# Altium PCB 2016.PcbDoc (part 4 of 6)
Units mm, origin at the board's own origin, x right, y up, seen from the top; angles counter-clockwise.
Board outline 169.8 x 134.24 mm, 2 copper layers (Top Layer, Bottom Layer); 131 components, 191 nets, 797 pads, 168 vias.
Unrouted connection lines stored in the file: 2.
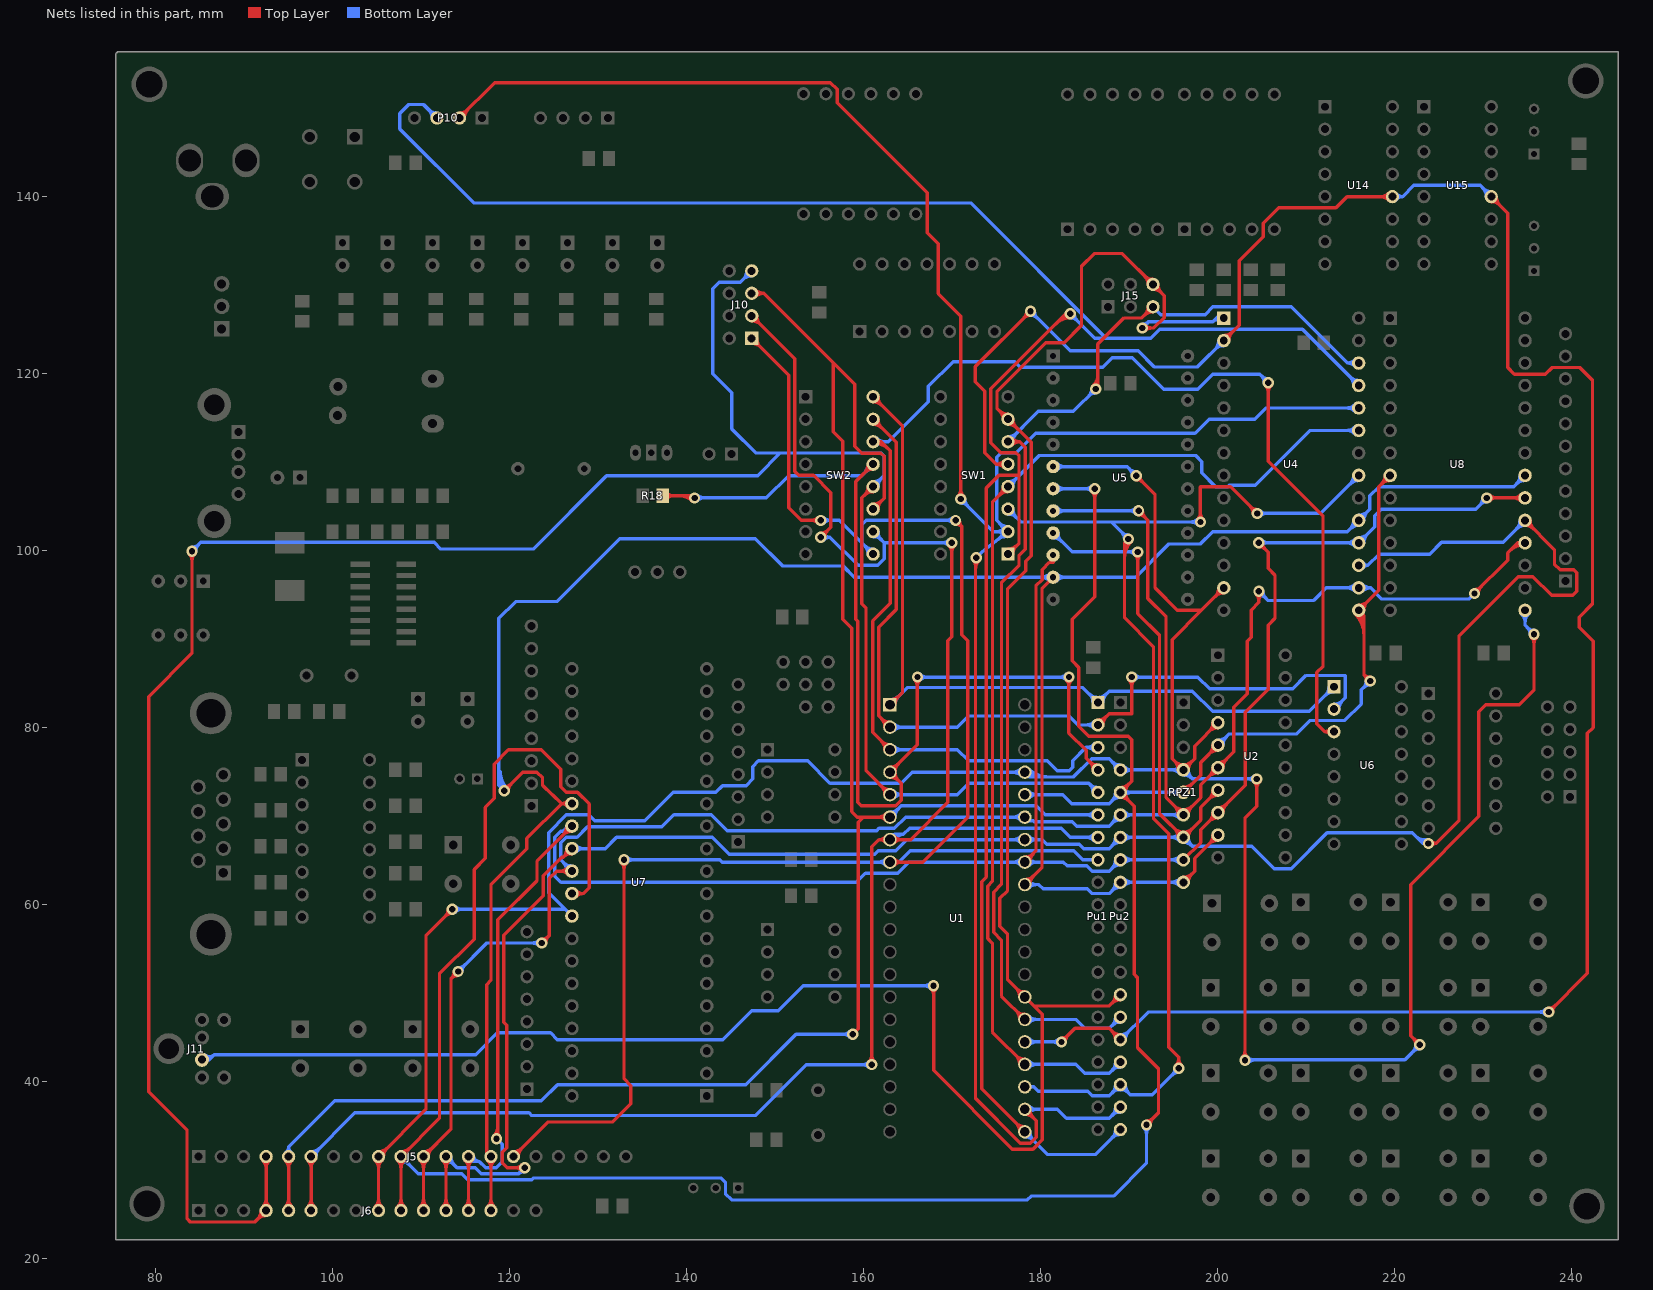
[diagram p4: the nets of this part, all layers, seen from the top]

## Via types
v1: diameter 1.27, hole 0.711, Top Layer to Bottom Layer, 165 vias
v2: diameter 1, hole 0.5, Top Layer to Bottom Layer, 3 vias

## Nets (pads, with @x,y where several pads share a name; then routed paths per layer and width w, separated by ;. In a path a pad name is that pad's centre, name@x,y a point inside that pad or via, vN(x,y) a via of type N, cw(c..) or ccw(c..) an arc to the next point about the centre after c; other vN are vias at no path point) (continued)
P0.2: J5.9 J6.9 Pu2.4 RPZ1.4 U1.37 U2.4 U4.13 U5.6 U7.32 U8.15 | length 375.8
  Top Layer w0.381: J6.9@104.76,25.796 ccw(c103.805,26.751) 105.156,26.751 ccw(c106.507,26.751) J6.9@105.552,25.796 ; J5.9@104.76,31.1 cw(c103.805,30.145) 105.156,30.145 cw(c106.507,30.145) J5.9@105.552,31.1 ; J6.9@105.156,25.4 J5.9@105.156,31.496 110.515,36.855 110.515,56.464 v1(113.487,59.436) ; J5.9@105.156,32.055 ccw(c105.156,33.406) 106.111,32.451 ccw(c107.066,31.496) J5.9@105.715,31.496 ; v1@113.043,59.436 cw(c111.97,59.436) 112.728,58.677 cw(c113.487,57.918) v1@113.487,58.991 ; v1@190.754,107.988 cw(c190.754,106.915) 191.513,107.674 cw(c192.272,108.433) v1@191.198,108.433 ; v1(190.754,108.433) 192.888,106.299 192.888,95.737 195.416,93.209 198.111,93.209 ; RPZ1.4@195.516,75.184 ccw(c194.137,75.184) 195.112,76.16 ccw(c196.088,77.135) 196.088,75.755 ccw(c196.088,77.135) 197.064,76.16 ccw(c198.039,75.184) RPZ1.4@196.659,75.184 ; U2.4@199.428,80.518 cw(c198.048,80.518) 199.024,79.542 cw(c200,78.567) U2.4@200,79.947 ; U2.4@200,80.518 197.358,77.876 197.358,76.454 RPZ1.4@196.088,75.184 194.818,76.454 194.818,89.916 198.111,93.209 ; U4.13@200.088,95.758 cw(c198.709,95.758) 199.684,94.782 cw(c200.66,93.807) U4.13@200.66,95.186 ; U4.13@200.66,95.758 198.111,93.209 ; v1@202.733,42.682 ccw(c201.974,43.44) 203.048,43.44 ccw(c204.121,43.44) v1@203.362,42.682 ; v1(203.048,42.367) 203.048,69.748 204.394,71.095 v1(204.394,74.168) ; v1@204.079,73.854 cw(c203.321,73.095) 204.394,73.095 cw(c205.467,73.095) v1@204.708,73.854 ; v1@222.364,44.12 ccw(c221.291,44.12) 222.05,44.879 ccw(c222.809,45.637) v1@222.809,44.564 ; v1(222.809,44.12) 221.767,45.161 221.767,62.23 229.463,69.925 229.463,81.762 230.251,82.55 234.035,82.55 235.712,84.227 v1(235.712,90.5) ; v1@235.398,90.186 cw(c234.639,89.427) 235.712,89.427 cw(c236.785,89.427) v1@236.026,90.186
  Bottom Layer w0.381: v1(113.487,59.436) 126.238,59.436 ; v1@113.802,59.122 cw(c114.56,58.363) 114.56,59.436 cw(c114.56,60.509) v1@113.802,59.75 ; U7.32@127,58.674 126.238,59.436 ; U1.37@177.777,74.526 ccw(c176.801,73.55) 176.801,74.93 ccw(c176.801,76.31) U1.37@177.777,75.334 ; U1.37@178.046,74.795 ccw(c179.039,75.788) 179.039,74.384 ; U1.37@178.316,75.065 ccw(c179.959,76.708) 179.959,74.384 ; U1.37@178.585,75.334 ccw(c180.879,77.628) 180.879,74.384 ; U5.6@181.376,109.454 189.733,109.454 v1(190.754,108.433) ; U5.6@181.772,109.058 cw(c182.727,108.103) 182.727,109.454 cw(c182.727,110.805) U5.6@181.772,109.85 ; Pu2.4@188.417,75.184 ccw(c187.066,75.184) 188.021,76.139 ccw(c188.976,77.094) Pu2.4@188.976,75.743 ; Pu2.4@189.372,74.788 cw(c190.327,73.833) 190.327,75.184 cw(c190.327,76.535) Pu2.4@189.372,75.58 ; v1@190.309,108.433 ccw(c189.236,108.433) 189.995,109.191 ccw(c190.754,109.95) v1@190.754,108.877 ; RPZ1.4@195.684,74.78 ccw(c194.708,73.804) 194.708,75.184 ccw(c194.708,76.564) RPZ1.4@195.684,75.588 ; RPZ1.4@196.088,74.612 cw(c196.088,73.233) 197.064,74.208 cw(c198.039,75.184) RPZ1.4@196.659,75.184 ; v1(203.048,42.367) 203.124,42.443 221.132,42.443 v1(222.809,44.12) ; v1@203.362,42.053 cw(c204.305,41.11) 204.305,42.443 ; v1@203.362,42.682 ccw(c203.937,43.256) 203.937,42.443 ; v1@204.079,73.854 ccw(c203.321,73.095) 203.321,74.168 ccw(c203.321,75.241) v1@204.079,74.482 ; v1(204.394,74.168) 197.104,74.168 RPZ1.4@196.088,75.184 Pu2.4@188.976,75.184 187.706,76.454 185.737,76.454 183.667,74.384 178.727,74.384 U1.37@178.181,74.93 165.456,74.93 164.198,73.673 156.159,73.673 153.632,76.2 148.082,76.2 147.447,75.565 147.447,74.168 146.685,73.406 144.018,73.406 143.256,72.644 138.43,72.644 135.217,69.431 129.578,69.431 128.905,70.104 126.365,70.104 124.371,68.11 124.371,61.303 126.238,59.436 ; v1@222.364,44.12 cw(c221.291,44.12) 222.05,43.361 cw(c222.809,42.602) v1@222.809,43.675 ; U8.15@234.292,92.814 cw(c233.316,91.838) 234.696,91.838 cw(c236.076,91.838) U8.15@235.1,92.814 ; U8.15@234.696,93.218 234.696,91.516 v1(235.712,90.5) ; v1@235.267,90.5 ccw(c234.194,90.5) 234.953,91.259 ccw(c235.712,92.018) v1@235.712,90.945
P0.3: J5.10 J6.10 Pu2.5 RPZ1.5 U1.36 U2.5 U4.15 U5.7 U7.31 U8.8 | length 384.9
  Top Layer w0.381: J6.10@107.3,25.796 ccw(c106.345,26.751) 107.696,26.751 ccw(c109.047,26.751) J6.10@108.092,25.796 ; J5.10@107.3,31.1 cw(c106.345,30.145) 107.696,30.145 cw(c109.047,30.145) J5.10@108.092,31.1 ; J6.10@107.696,25.4 J5.10@107.696,31.496 112.039,35.839 112.039,52.146 115.951,56.058 115.951,63.932 117.196,65.176 117.196,70.942 118.212,71.958 118.212,75.844 119.837,77.47 123.52,77.47 125.73,75.26 125.73,73.279 126.365,72.644 127.635,72.644 128.943,71.336 128.943,61.887 128.27,61.214 ; J5.10@107.696,32.055 ccw(c107.696,33.406) 108.651,32.451 ccw(c109.606,31.496) J5.10@108.255,31.496 ; U7.31@127,61.214 128.27,61.214 ; U7.31@127.428,60.835 cw(c128.27,60.089) 128.27,61.214 ; U7.31@127.428,61.593 ccw(c128.27,62.339) 128.27,61.214 ; v1@185.766,106.64 cw(c185.007,105.881) 186.08,105.881 cw(c187.154,105.881) v1@186.395,106.64 ; v1(186.08,106.954) 186.08,94.767 183.54,92.227 183.54,87.503 184.29,86.754 184.29,80.124 185.42,78.994 189.865,78.994 190.246,78.613 190.246,73.914 Pu2.5@188.976,72.644 190.551,71.069 190.551,52.071 190.907,51.715 190.907,43.814 193.281,41.44 193.281,36.436 v1(191.922,35.077) ; Pu2.5@188.976,72.085 cw(c188.976,70.734) 189.931,71.689 cw(c190.886,72.644) 189.535,72.644 cw(c190.886,72.644) 189.931,73.599 cw(c188.976,74.554) Pu2.5@188.976,73.203 ; v1@191.922,35.522 ccw(c191.922,36.595) 192.681,35.836 ccw(c193.44,35.077) v1@192.367,35.077 ; RPZ1.5@196.088,72.644 198.044,74.6 198.044,76.022 U2.5@200,77.978 ; RPZ1.5@196.088,73.215 ccw(c196.088,74.595) 197.064,73.62 ccw(c198.039,72.644) RPZ1.5@196.659,72.644 ; U2.5@199.428,77.978 cw(c198.048,77.978) 199.024,77.002 cw(c200,76.027) U2.5@200,77.406 ; U4.15@215.496,92.814 cw(c213.083,90.401) 216.495,90.401 ; U4.15@215.765,93.083 cw(c214.003,91.321) 216.495,91.321 ; U4.15@215.9,93.789 ccw(c215.9,95.169) 216.876,94.194 ccw(c217.851,93.218) U4.15@216.471,93.218 ; U4.15@216.035,93.353 cw(c214.923,92.241) 216.495,92.241 ; v1@216.764,85.251 ccw(c215.845,85.293) 216.495,85.944 ; v1@217.188,85.675 cw(c217.146,86.595) 216.495,85.944 ; v1(217.208,85.231) 216.495,85.944 ; U8.8@218.885,108.458 cw(c217.505,108.458) 218.48,107.482 cw(c219.456,106.507) U8.8@219.456,107.886 ; U8.8@219.456,108.458 218.186,107.188 218.186,95.504 U4.15@215.9,93.218 216.495,92.623 216.495,85.944
  Bottom Layer w0.381: J5.10@107.696,30.937 cw(c107.696,29.586) 108.651,30.541 cw(c109.606,31.496) J5.10@108.255,31.496 ; J5.10@107.696,31.496 109.627,29.565 114.553,29.565 115.239,28.879 122.465,28.879 122.668,29.082 143.845,29.082 144.351,28.575 144.351,27.305 145.062,26.594 178.473,26.594 178.918,27.038 188.201,27.038 191.922,30.759 v1(191.922,35.077) ; U1.36@178.181,72.39 182.448,72.39 183.464,71.374 187.706,71.374 Pu2.5@188.976,72.644 RPZ1.5@196.088,72.644 ; U1.36@178.585,71.986 cw(c179.561,71.01) 179.561,72.39 cw(c179.561,73.77) U1.36@178.585,72.794 ; U5.7@181.376,106.954 v1(186.08,106.954) ; U5.7@181.772,106.558 cw(c182.727,105.603) 182.727,106.954 cw(c182.727,108.305) U5.7@181.772,107.35 ; v1@185.766,106.64 ccw(c185.007,105.881) 185.007,106.954 ccw(c185.007,108.027) v1@185.766,107.268 ; Pu2.5@188.417,72.644 cw(c187.066,72.644) 188.021,71.689 cw(c188.976,70.734) Pu2.5@188.976,72.085 ; Pu2.5@189.372,72.248 cw(c190.327,71.293) 190.327,72.644 cw(c190.327,73.995) Pu2.5@189.372,73.04 ; v1@191.608,34.763 cw(c190.849,34.004) 191.922,34.004 cw(c192.996,34.004) v1@192.237,34.763 ; RPZ1.5@195.684,72.24 ccw(c194.708,71.264) 194.708,72.644 ccw(c194.708,74.024) RPZ1.5@195.684,73.048 ; U2.5@200,77.978 201.27,79.248 208.89,79.248 210.414,80.772 214.351,80.772 216.205,82.626 216.205,84.228 v1(217.208,85.231) ; U2.5@200,78.549 ccw(c200,79.929) 200.975,78.954 ccw(c201.951,77.978) U2.5@200.571,77.978 ; v1@216.764,85.231 cw(c215.69,85.231) 216.449,84.472 cw(c217.208,83.714) v1@217.208,84.787
P0.4: J5.11 J6.11 Pu2.6 RPZ1.6 U1.35 U2.6 U4.16 U5.8 U7.30 U8.18 | length 290.1
  Top Layer w0.381: J6.11@109.84,25.796 ccw(c108.885,26.751) 110.236,26.751 ccw(c111.587,26.751) J6.11@110.632,25.796 ; J5.11@109.84,31.1 cw(c108.885,30.145) 110.236,30.145 cw(c111.587,30.145) J5.11@110.632,31.1 ; J6.11@110.236,25.4 J5.11@110.236,31.496 113.337,34.597 113.337,51.59 v1(114.148,52.4) ; J5.11@110.236,32.055 ccw(c110.236,33.406) 111.191,32.451 ccw(c112.146,31.496) J5.11@110.795,31.496 ; v1@113.703,52.4 cw(c112.63,52.4) 113.389,51.641 cw(c114.148,50.883) v1@114.148,51.956 ; v1(123.596,55.626) 124.435,56.464 124.435,62.918 125.271,63.754 U7.30@127,63.754 ; v1@123.596,56.07 ccw(c123.596,57.144) 124.355,56.385 ccw(c125.114,55.626) v1@124.041,55.626 ; U7.30@126.596,63.35 ccw(c125.62,62.374) 125.62,63.754 ccw(c125.62,65.134) U7.30@126.596,64.158 ; v1@191.035,104.01 cw(c191.035,102.936) 191.793,103.695 cw(c192.552,104.454) v1@191.479,104.454 ; v1(191.035,104.454) 192.075,103.414 192.075,94.551 194.132,92.494 194.132,72.06 RPZ1.6@196.088,70.104 198.044,72.06 198.044,73.482 U2.6@200,75.438 201.803,77.241 201.803,82.271 203.327,83.795 203.327,89.738 203.759,90.17 203.759,93.243 204.622,94.107 v1(204.622,95.377) ; RPZ1.6@195.516,70.104 ccw(c194.137,70.104) 195.112,71.08 ccw(c196.088,72.055) 196.088,70.675 ccw(c196.088,72.055) 197.064,71.08 ccw(c198.039,70.104) RPZ1.6@196.659,70.104 ; U2.6@199.428,75.438 cw(c198.048,75.438) 199.024,74.462 cw(c200,73.487) U2.6@200,74.867 ; U2.6@200,76.01 ccw(c200,77.389) 200.975,76.414 ccw(c201.951,75.438) U2.6@200.571,75.438 ; v1@204.308,95.063 cw(c203.549,94.304) 204.622,94.304 cw(c205.696,94.304) v1@204.937,95.063 ; v1(228.981,95.123) 232.74,98.882 232.74,99.695 233.883,100.838 U8.18@234.696,100.838 ; v1@228.981,95.567 ccw(c228.981,96.641) 229.74,95.882 ccw(c230.499,95.123) v1@229.425,95.123 ; 232.984,99.939 cw(c234.695,98.228) U8.18@234.696,100.647 ; 233.634,100.589 cw(c234.696,99.528) U8.18@234.696,101.028
  Bottom Layer w0.381: v1(114.148,52.4) 117.373,55.626 v1(123.596,55.626) ; v1@114.148,52.845 ccw(c114.148,53.918) 114.906,53.159 ccw(c115.665,52.4) v1@114.592,52.4 ; v1@123.282,55.312 ccw(c122.523,54.553) 122.523,55.626 ccw(c122.523,56.699) v1@123.282,55.94 ; U7.30@126.428,63.754 ccw(c125.049,63.754) 126.024,64.73 ccw(c127,65.705) U7.30@127,64.325 ; U7.30@127,63.754 125.743,65.011 125.743,66.942 126.365,67.564 127.584,67.564 128.765,68.745 137.173,68.745 138.532,70.104 142.773,70.104 144.551,68.326 161.442,68.326 161.696,68.58 163.449,68.58 164.719,69.85 U1.35@178.181,69.85 178.181,69.444 179.121,69.444 179.222,69.342 183.54,69.342 184.048,68.834 187.706,68.834 Pu2.6@188.976,70.104 RPZ1.6@196.088,70.104 ; U1.35@177.777,69.446 ccw(c176.801,68.47) 176.801,69.85 ccw(c176.801,71.23) U1.35@177.777,70.254 ; U5.8@181.376,104.454 v1(191.035,104.454) ; U5.8@181.772,104.058 cw(c182.727,103.103) 182.727,104.454 cw(c182.727,105.805) U5.8@181.772,104.85 ; Pu2.6@188.417,70.104 cw(c187.066,70.104) 188.021,69.149 cw(c188.976,68.194) Pu2.6@188.976,69.545 ; Pu2.6@189.372,69.708 cw(c190.327,68.753) 190.327,70.104 cw(c190.327,71.455) Pu2.6@189.372,70.5 ; v1@190.72,104.14 ccw(c189.962,103.381) 189.962,104.454 ccw(c189.962,105.527) v1@190.72,104.768 ; RPZ1.6@195.684,69.7 ccw(c194.708,68.724) 194.708,70.104 ccw(c194.708,71.484) RPZ1.6@195.684,70.508 ; v1@204.622,94.932 cw(c204.622,93.859) 205.381,94.618 cw(c206.14,95.377) v1@205.067,95.377 ; v1(204.622,95.377) 205.677,94.323 210.795,94.323 212.23,95.758 U4.16@215.9,95.758 217.246,95.758 ; U4.16@215.496,95.354 ccw(c214.52,94.378) 214.52,95.758 ccw(c214.52,97.138) U4.16@215.496,96.162 ; U4.16@216.311,95.361 cw(c217.246,94.458) 217.246,95.758 ; U4.16@216.311,96.155 ccw(c217.246,97.058) 217.246,95.758 ; v1(228.981,95.123) 228.346,94.488 218.516,94.488 217.246,95.758
P0.5: J5.12 J6.12 Pu2.7 RPZ1.7 U1.34 U2.7 U4.17 U5.9 U7.29 U8.19 | length 336
  Top Layer w0.381: J6.12@112.38,25.796 ccw(c111.425,26.751) 112.776,26.751 ccw(c114.127,26.751) J6.12@113.172,25.796 ; J5.12@112.38,31.1 cw(c111.425,30.145) 112.776,30.145 cw(c114.127,30.145) J5.12@113.172,31.1 ; J6.12@112.776,25.4 J5.12@112.776,31.496 ; v1@121.352,29.912 ccw(c120.593,29.153) 120.593,30.226 ccw(c120.593,31.299) v1@121.352,30.54 ; v1(121.666,30.226) 119.697,30.226 119.126,30.797 119.126,31.987 119.621,32.482 119.621,46.341 119.303,46.659 119.303,56.514 123.749,60.96 123.749,63.246 125.832,65.329 126.035,65.329 ; U7.29@126.429,66.29 cw(c125.084,66.279) 126.035,65.329 ; U7.29@126.996,65.723 ccw(c126.985,64.378) 126.035,65.329 ; U7.29@127,66.294 126.035,65.329 ; v1@190.63,99.5 cw(c189.871,98.741) 190.945,98.741 cw(c192.018,98.741) v1@191.259,99.5 ; v1(190.945,99.814) 190.945,92.85 193.396,90.399 193.396,70.256 RPZ1.7@196.088,67.564 198.044,69.52 198.044,70.942 U2.7@200,72.898 ; RPZ1.7@195.516,67.564 ccw(c194.137,67.564) 195.112,68.54 ccw(c196.088,69.515) 196.088,68.135 ccw(c196.088,69.515) 197.064,68.54 ccw(c198.039,67.564) RPZ1.7@196.659,67.564 ; U2.7@199.428,72.898 cw(c198.048,72.898) 199.024,71.922 cw(c200,70.947) U2.7@200,72.326 ; v1(223.774,66.878) 224.663,66.878 ; v1@224.13,66.612 cw(c224.663,66.212) 224.663,66.878 ; v1@224.13,67.145 ccw(c224.663,67.545) 224.663,66.878 ; U8.19@234.696,102.806 cw(c234.696,101.427) 235.672,102.402 cw(c236.647,103.378) U8.19@235.267,103.378 ; U8.19@234.696,103.378 238.023,100.051 238.023,98.425 238.658,97.79 240.22,97.79 240.538,97.472 240.538,95.377 240.068,94.907 237.693,94.907 235.585,97.015 233.947,97.015 227.228,90.297 227.228,69.444 224.663,66.878
  Bottom Layer w0.381: J5.12@112.776,30.937 cw(c112.776,29.586) 113.731,30.541 cw(c114.686,31.496) J5.12@113.335,31.496 ; J5.12@112.776,31.496 114.021,30.251 116.078,30.251 116.764,29.565 121.005,29.565 ; v1@121.224,30.181 cw(c120.467,30.103) 121.005,29.565 ; v1@121.621,29.784 ccw(c121.543,29.027) 121.005,29.565 ; v1(121.666,30.226) 121.005,29.565 ; U7.29@127,66.294 130.772,66.294 132.042,67.564 142.875,67.564 144.78,65.659 161.226,65.659 161.62,66.053 163.589,66.053 164.846,67.31 U1.34@178.181,67.31 180.137,67.31 180.645,66.802 184.328,66.802 184.836,66.294 187.706,66.294 Pu2.7@188.976,67.564 RPZ1.7@196.088,67.564 197.104,66.548 203.822,66.548 206.35,64.021 208.267,64.021 212.319,68.072 221.945,68.072 223.139,66.878 v1(223.774,66.878) ; U7.29@127.404,65.89 cw(c128.38,64.914) 128.38,66.294 cw(c128.38,67.674) U7.29@127.404,66.698 ; U1.34@177.777,66.906 ccw(c176.801,65.93) 176.801,67.31 ccw(c176.801,68.69) U1.34@177.777,67.714 ; U1.34@178.585,66.906 cw(c179.561,65.93) 179.561,67.31 cw(c179.561,68.69) U1.34@178.585,67.714 ; U5.9@181.376,101.395 cw(c181.376,100.044) 182.331,100.999 cw(c183.286,101.954) U5.9@181.936,101.954 ; U5.9@181.376,101.954 183.516,99.814 v1(190.945,99.814) ; Pu2.7@188.417,67.564 cw(c187.066,67.564) 188.021,66.609 cw(c188.976,65.654) Pu2.7@188.976,67.005 ; Pu2.7@189.372,67.168 cw(c190.327,66.213) 190.327,67.564 cw(c190.327,68.915) Pu2.7@189.372,67.96 ; v1@190.63,99.5 ccw(c189.871,98.741) 189.871,99.814 ccw(c189.871,100.887) v1@190.63,100.129 ; RPZ1.7@195.684,67.16 ccw(c194.708,66.184) 194.708,67.564 ccw(c194.708,68.944) RPZ1.7@195.684,67.968 ; RPZ1.7@196.088,66.992 cw(c196.088,65.613) 197.064,66.588 cw(c198.039,67.564) RPZ1.7@196.659,67.564 ; U4.17@215.9,98.298 216.941,98.298 ; U4.17@216.382,97.991 cw(c216.941,97.635) 216.941,98.298 ; U4.17@216.382,98.605 ccw(c216.941,98.961) 216.941,98.298 ; 222.263,67.754 ccw(c223.392,68.884) v1@223.691,67.315 ; 222.772,67.245 ccw(c223.555,68.029) v1@223.762,66.941 ; U8.19@234.124,103.378 cw(c232.745,103.378) 233.72,102.402 cw(c234.696,101.427) U8.19@234.696,102.806 ; U8.19@234.696,103.378 232.215,100.897 225.255,100.897 223.926,99.568 218.211,99.568 216.941,98.298
P0.6: J5.13 J6.13 Pu2.8 RPZ1.8 U1.33 U2.8 U4.18 U5.10 U7.28 U8.20 | length 285.1
  Top Layer w0.381: J6.13@114.92,25.796 ccw(c113.965,26.751) 115.316,26.751 ccw(c116.667,26.751) J6.13@115.712,25.796 ; J5.13@114.92,31.1 cw(c113.965,30.145) 115.316,30.145 cw(c116.667,30.145) J5.13@115.712,31.1 ; J6.13@115.316,25.4 J5.13@115.316,31.496 ; v1@118.177,33.817 ccw(c117.113,34.881) 118.617,34.881 ; v1(118.491,33.503) 118.617,33.629 118.617,58.241 123.063,62.687 123.063,64.897 U7.28@127,68.834 ; 118.617,34.271 ccw(c119.259,34.271) v1@118.805,33.817 ; U7.28@126.428,68.834 cw(c125.049,68.834) 126.024,67.858 cw(c127,66.883) U7.28@127,68.263 ; U1.33@178.181,64.77 179.438,66.027 179.438,95.986 180.131,96.679 180.131,97.79 180.964,98.623 181.376,98.623 U5.10@181.376,99.454 ; U1.33@178.181,65.341 ccw(c178.181,66.721) 179.157,65.746 ccw(c180.132,64.77) U1.33@178.752,64.77 ; RPZ1.8@196.088,65.024 198.044,66.98 198.044,68.402 U2.8@200,70.358 203.073,73.431 203.073,81.712 205.664,84.303 205.664,91.516 206.439,92.291 206.439,97.206 205.664,97.98 205.664,99.797 v1(204.597,100.863) ; U2.8@199.428,70.358 cw(c198.048,70.358) 199.024,69.382 cw(c200,68.407) U2.8@200,69.787 ; U2.8@200,70.929 ccw(c200,72.309) 200.975,71.334 ccw(c201.951,70.358) U2.8@200.571,70.358 ; v1@204.597,100.419 cw(c204.597,99.346) 205.356,100.105 cw(c206.115,100.863) v1@205.041,100.863 ; v1(230.378,105.918) U8.20@234.696,105.918 ; v1@230.692,105.604 cw(c231.451,104.845) 231.451,105.918 cw(c231.451,106.991) v1@230.692,106.232 ; U8.20@234.292,105.514 ccw(c233.316,104.538) 233.316,105.918 ccw(c233.316,107.298) U8.20@234.292,106.322
  Bottom Layer w0.381: J5.13@115.316,31.496 115.876,30.936 116.561,30.936 ; J5.13@115.493,31.515 ccw(c116.137,31.584) 116.137,30.936 ; J5.13@115.872,31.556 ccw(c116.561,31.629) 116.561,30.936 ; v1(118.491,33.503) 119.126,32.868 119.126,30.912 118.465,30.251 117.247,30.251 116.561,30.936 ; 126.149,68.25 ccw(c126.149,68.914) U7.28@126.81,68.852 ; U7.28@126.431,68.888 cw(c125.73,68.954) 125.73,68.25 ; U7.28@127,68.834 126.416,68.25 125.73,68.25 ; U1.33@177.777,64.366 ccw(c176.801,63.39) 176.801,64.77 ccw(c176.801,66.15) U1.33@177.777,65.174 ; U1.33@178.585,64.366 cw(c179.561,63.39) 179.561,64.77 cw(c179.561,66.15) U1.33@178.585,65.174 ; Pu2.8@188.417,65.024 cw(c187.066,65.024) 188.021,64.069 cw(c188.976,63.114) Pu2.8@188.976,64.465 ; Pu2.8@189.372,64.628 cw(c190.327,63.673) 190.327,65.024 cw(c190.327,66.375) Pu2.8@189.372,65.42 ; RPZ1.8@195.684,64.62 ccw(c194.708,63.644) 194.708,65.024 ccw(c194.708,66.404) RPZ1.8@195.684,65.428 ; RPZ1.8@196.088,65.024 Pu2.8@188.976,65.024 187.706,63.754 185.776,63.754 185.191,64.338 182.956,64.338 182.524,64.77 U1.33@178.181,64.77 165.075,64.77 163.805,63.5 160.172,63.5 159.156,62.484 125.768,62.484 125.057,63.195 125.057,67.577 125.73,68.25 ; v1(204.597,100.863) 204.622,100.838 U4.18@215.9,100.838 217.703,102.641 217.703,103.911 218.44,104.648 229.108,104.648 v1(230.378,105.918) ; v1@204.911,100.549 cw(c205.609,99.852) 205.609,100.838 ; v1@204.911,101.178 ccw(c205.731,101.998) 205.731,100.838 ; U4.18@215.496,100.434 ccw(c214.52,99.458) 214.52,100.838 ccw(c214.52,102.218) U4.18@215.496,101.242 ; U4.18@215.9,101.409 ccw(c215.9,102.789) 216.876,101.814 ccw(c217.851,100.838) U4.18@216.471,100.838 ; v1@229.933,105.918 cw(c228.86,105.918) 229.619,105.159 cw(c230.378,104.4) v1@230.378,105.474
P0.7: J5.14 J6.14 Pu2.9 RPZ1.9 U1.32 U2.9 U4.19 U5.11 U7.27 U8.21 | length 305.6
  Top Layer w0.381: J6.14@117.46,25.796 ccw(c116.505,26.751) 117.856,26.751 ccw(c119.207,26.751) J6.14@118.252,25.796 ; J5.14@117.46,31.1 cw(c116.505,30.145) 117.856,30.145 cw(c119.207,30.145) J5.14@118.252,31.1 ; J6.14@117.856,25.4 J5.14@117.856,31.496 117.361,31.991 117.361,50.914 117.856,51.409 117.856,62.23 121.911,66.285 121.911,67.437 125.848,71.374 ; v1(119.355,72.822) 121.463,74.93 123.05,74.93 123.685,74.295 123.685,73.419 125.848,71.374 ; v1@119.355,73.266 ccw(c119.355,74.339) 120.113,73.581 ccw(c120.872,72.822) v1@119.799,72.822 ; U7.27@126.545,71.028 ccw(c125.848,70.499) 125.848,71.374 ; U7.27@126.545,71.72 cw(c125.848,72.249) 125.848,71.374 ; U7.27@127,71.374 125.848,71.374 ; U1.32@178.181,62.23 180.124,64.173 180.124,95.702 U5.11@181.376,96.954 ; U1.32@178.181,62.801 ccw(c178.181,64.181) 179.157,63.206 ccw(c180.132,62.23) U1.32@178.752,62.23 ; RPZ1.9@196.088,62.484 197.358,63.754 197.358,65.176 U2.9@200,67.818 ; RPZ1.9@196.088,63.055 ccw(c196.088,64.435) 197.064,63.46 ccw(c198.039,62.484) RPZ1.9@196.659,62.484 ; U2.9@199.428,67.818 cw(c198.048,67.818) 199.024,66.842 cw(c200,65.867) U2.9@200,67.246
  Bottom Layer w0.381: 118.91,74.048 ccw(c120.581,74.048) v1@119.4,72.867 ; 118.91,74.968 ccw(c121.501,74.968) v1@119.669,73.136 ; v1(119.355,72.822) 118.745,73.431 118.745,92.304 120.65,94.209 125.298,94.209 132.41,101.321 147.726,101.321 150.825,98.222 157.632,98.222 158.9,96.954 190.705,96.954 194.46,100.709 198.016,100.709 199.415,102.108 214.63,102.108 217.17,104.648 217.17,106.147 218.211,107.188 233.426,107.188 U8.21@234.696,108.458 ; U1.32@178.181,62.23 179.756,62.23 180.238,61.747 185.242,61.747 185.776,61.214 187.706,61.214 Pu2.9@188.976,62.484 RPZ1.9@196.088,62.484 ; U1.32@178.585,61.826 cw(c179.561,60.85) 179.561,62.23 cw(c179.561,63.61) U1.32@178.585,62.634 ; U5.11@180.98,96.558 ccw(c180.025,95.603) 180.025,96.954 ccw(c180.025,98.305) U5.11@180.98,97.35 ; U5.11@181.772,96.558 cw(c182.727,95.603) 182.727,96.954 cw(c182.727,98.305) U5.11@181.772,97.35 ; Pu2.9@188.417,62.484 cw(c187.066,62.484) 188.021,61.529 cw(c188.976,60.574) Pu2.9@188.976,61.925 ; Pu2.9@189.372,62.088 cw(c190.327,61.133) 190.327,62.484 cw(c190.327,63.835) Pu2.9@189.372,62.88 ; RPZ1.9@195.684,62.08 ccw(c194.708,61.104) 194.708,62.484 ccw(c194.708,63.864) RPZ1.9@195.684,62.888 ; U4.19@215.328,103.378 cw(c213.949,103.378) 214.924,102.402 cw(c215.9,101.427) U4.19@215.9,102.806 ; U4.19@215.9,103.95 ccw(c215.9,105.329) 216.876,104.354 ccw(c217.851,103.378) U4.19@216.471,103.378 ; U8.21@234.124,108.458 cw(c232.745,108.458) 233.72,107.482 cw(c234.696,106.507) U8.21@234.696,107.886
P1.0: Pu1.1 SW2.16 U1.1 U6.1 | length 103.9
  Top Layer w0.381: SW2.16@161.036,116.789 cw(c161.036,115.438) 161.991,116.393 cw(c162.946,117.348) SW2.16@161.595,117.348 ; SW2.16@161.036,117.348 164.359,114.025 164.359,83.968 U1.1@162.941,82.55 ; U1.1@162.941,83.121 ccw(c162.941,84.501) 163.917,83.526 ccw(c164.892,82.55) U1.1@163.512,82.55
  Bottom Layer w0.381: U1.1@162.941,82.55 164.884,84.493 184.747,84.493 Pu1.1@186.436,82.804 187.706,84.074 197.117,84.074 199.39,81.801 210.325,81.801 U6.1@213.106,84.582 ; U1.1@162.941,83.121 ccw(c162.941,84.501) 163.917,83.526 ccw(c164.892,82.55) U1.1@163.512,82.55 ; Pu1.1@185.877,82.804 ccw(c184.526,82.804) 185.481,83.759 ccw(c186.436,84.714) 186.436,83.363 ccw(c186.436,84.714) 187.391,83.759 ccw(c188.346,82.804) Pu1.1@186.995,82.804 ; U6.1@212.547,84.582 cw(c211.196,84.582) 212.151,83.627 cw(c213.106,82.672) U6.1@213.106,84.023
P1.1: Pu1.2 SW2.15 U1.2 U6.2 | length 116
  Top Layer w0.381: SW2.15@161.036,114.249 cw(c161.036,112.898) 161.991,113.853 cw(c162.946,114.808) SW2.15@161.595,114.808 ; SW2.15@161.036,114.808 163.653,112.191 163.653,93.308 161.671,91.326 161.671,81.28 U1.2@162.941,80.01 ; U1.2@162.369,80.01 ccw(c160.99,80.01) 161.965,80.986 ccw(c162.941,81.961) U1.2@162.941,80.581 ; Pu1.2@186.436,80.264 187.706,81.534 190.246,81.534 v1(190.246,85.674) ; Pu1.2@186.436,80.823 ccw(c186.436,82.174) 187.391,81.219 ccw(c188.346,80.264) Pu1.2@186.995,80.264 ; v1@189.932,85.36 cw(c189.173,84.601) 190.246,84.601 cw(c191.319,84.601) v1@190.56,85.36
  Bottom Layer w0.381: U1.2@162.941,80.01 170.561,80.01 171.831,81.28 183.159,81.28 184.175,80.264 Pu1.2@186.436,80.264 ; U1.2@163.345,79.606 cw(c164.321,78.63) 164.321,80.01 cw(c164.321,81.39) U1.2@163.345,80.414 ; Pu1.2@186.04,79.868 ccw(c185.085,78.913) 185.085,80.264 ccw(c185.085,81.615) Pu1.2@186.04,80.66 ; v1(190.246,85.674) 197.739,85.674 199.072,84.341 208.432,84.341 209.944,85.852 214.376,85.852 214.376,83.312 U6.2@213.106,82.042 ; v1@190.56,85.36 cw(c191.319,84.601) 191.319,85.674 cw(c191.319,86.747) v1@190.56,85.989 ; U6.2@213.106,82.601 ccw(c213.106,83.952) 214.061,82.997 ccw(c215.016,82.042) U6.2@213.665,82.042
P1.2: Pu1.3 SW2.14 U1.3 U6.3 | length 176.6
  Top Layer w0.381: SW2.14@161.027,112.47 cw(c161.1,110.909) 162.205,112.014 ; SW2.14@161.036,112.268 161.951,112.268 162.967,111.252 162.967,93.993 160.985,92.011 160.985,79.426 U1.3@162.941,77.47 ; SW2.14@161.044,112.09 cw(c161.154,109.743) 162.815,111.404 ; U1.3@162.369,77.47 ccw(c160.99,77.47) 161.965,78.446 ccw(c162.941,79.421) U1.3@162.941,78.041 ; v1@205.375,118.608 cw(c204.616,117.85) 205.689,117.85 cw(c206.762,117.85) v1@206.004,118.608 ; v1(205.689,118.923) 205.689,110.036 211.874,103.851 211.874,86.893 211.175,86.194 211.175,80.417 212.09,79.502 ; U6.3@212.633,79.203 ccw(c212.09,78.859) 212.09,79.502 ; U6.3@212.633,79.801 cw(c212.09,80.145) 212.09,79.502 ; U6.3@213.106,79.502 212.09,79.502
  Bottom Layer w0.381: SW2.14@161.036,112.268 162.767,112.268 167.283,116.784 167.283,118.515 170.078,121.31 177.063,121.31 177.673,120.701 186.969,120.701 188.036,121.768 190.309,121.768 193.868,118.209 197.736,118.209 199.415,119.888 204.724,119.888 v1(205.689,118.923) ; SW2.14@161.432,111.872 cw(c162.387,110.917) 162.387,112.268 cw(c162.387,113.619) SW2.14@161.432,112.664 ; U1.3@162.941,77.47 170.561,77.47 171.831,76.2 180.708,76.2 181.839,75.07 183.197,75.07 183.604,75.476 183.604,76.239 185.089,77.724 Pu1.3@186.436,77.724 ; U1.3@163.345,77.066 cw(c164.321,76.09) 164.321,77.47 cw(c164.321,78.85) U1.3@163.345,77.874 ; Pu1.3@186.04,77.329 ccw(c185.089,76.383) 185.089,77.724 ccw(c185.089,79.065) Pu1.3@186.04,78.119 ; v1@205.245,118.923 ccw(c204.172,118.923) 204.93,119.682 ccw(c205.689,120.44) v1@205.689,119.367
P1.3: Pu1.4 R18.2 SW2.13 U1.4 | length 137.9
  Top Layer w0.381: R18.2@137.287,106.172 140.614,106.172 v1(140.868,105.918) ; R18.2@137.646,105.813 cw(c138.513,104.946) 138.513,106.172 cw(c138.513,107.398) R18.2@137.646,106.531 ; 139.182,106.172 cw(c139.182,104.232) v1@140.554,105.604 ; 140.102,106.172 cw(c140.102,105.151) v1@140.823,105.873 ; SW2.13@160.477,109.728 cw(c159.126,109.728) 160.081,108.773 cw(c161.036,107.818) SW2.13@161.036,109.169 ; SW2.13@161.036,109.728 159.08,107.772 159.08,92.198 159.315,91.963 159.315,71.52 159.715,71.12 163.576,71.12 164.211,71.755 164.211,73.66 U1.4@162.941,74.93 166.04,78.029 v1(166.04,85.674) ; U1.4@162.941,74.358 cw(c162.941,72.979) 163.917,73.954 cw(c164.892,74.93) 163.512,74.93 cw(c164.892,74.93) 163.917,75.906 cw(c162.941,76.881) U1.4@162.941,75.501 ; v1@165.725,85.36 cw(c164.967,84.601) 166.04,84.601 cw(c167.113,84.601) v1@166.354,85.36 ; v1@182.845,85.36 cw(c182.086,84.601) 183.159,84.601 cw(c184.233,84.601) v1@183.474,85.36 ; v1(183.159,85.674) 183.159,79.35 185.102,77.407 185.102,76.517 Pu1.4@186.436,75.184 ; Pu1.4@185.877,75.184 ccw(c184.526,75.184) 185.481,76.139 ccw(c186.436,77.094) Pu1.4@186.436,75.743
  Bottom Layer w0.381: v1(140.868,105.918) 148.97,105.918 151.485,108.433 159.741,108.433 SW2.13@161.036,109.728 ; v1@141.183,105.604 cw(c141.942,104.845) 141.942,105.918 cw(c141.942,106.991) v1@141.183,106.232 ; SW2.13@160.477,109.728 cw(c159.126,109.728) 160.081,108.773 cw(c161.036,107.818) SW2.13@161.036,109.169 ; v1(166.04,85.674) v1(183.159,85.674) ; v1@166.354,85.36 cw(c167.113,84.601) 167.113,85.674 cw(c167.113,86.747) v1@166.354,85.989 ; v1@182.845,85.36 ccw(c182.086,84.601) 182.086,85.674 ccw(c182.086,86.747) v1@182.845,85.989
P1.4: J5.4 J6.4 J10.7 Pu1.5 SW2.12 U1.5 | length 294.8
  Top Layer w0.381: v1@83.76,99.584 cw(c83.001,98.825) 84.074,98.825 cw(c85.147,98.825) v1@84.388,99.584 ; v1(84.074,99.898) 84.074,88.341 79.197,83.464 79.197,38.811 83.515,34.493 83.515,24.447 83.858,24.105 91.161,24.105 J6.4@92.456,25.4 J5.4@92.456,31.496 ; J6.4@91.897,25.4 cw(c90.546,25.4) 91.501,24.445 cw(c92.456,23.49) J6.4@92.456,24.841 ; J6.4@92.06,25.796 ccw(c91.105,26.751) 92.456,26.751 ccw(c93.807,26.751) J6.4@92.852,25.796 ; J5.4@92.06,31.1 cw(c91.105,30.145) 92.456,30.145 cw(c93.807,30.145) J5.4@92.852,31.1 ; SW2.12@160.477,107.188 cw(c159.126,107.188) 160.081,106.233 cw(c161.036,105.278) SW2.12@161.036,106.629 ; SW2.12@161.036,107.188 159.766,105.918 159.766,93.941 160.236,93.471 160.236,75.095 U1.5@162.941,72.39 ; U1.5@162.369,72.39 ccw(c160.99,72.39) 161.965,73.366 ccw(c162.941,74.341) U1.5@162.941,72.962
  Bottom Layer w0.381: v1(84.074,99.898) 85.063,100.887 111.457,100.887 112.203,100.141 122.62,100.141 130.913,108.434 148.002,108.434 150.566,110.998 ; v1@84.074,100.343 ccw(c84.074,101.416) 84.833,100.657 ccw(c85.592,99.898) v1@84.519,99.898 ; J10.7@146.761,131.572 cw(c145.41,131.572) 146.365,130.617 cw(c147.32,129.662) J10.7@147.32,131.013 ; J10.7@147.32,131.572 146.05,130.302 143.662,130.302 142.9,129.54 142.9,119.939 145.047,117.792 145.047,113.703 147.752,110.998 161.925,110.998 162.306,110.617 162.306,108.458 SW2.12@161.036,107.188 ; SW2.12@161.036,107.747 ccw(c161.036,109.098) 161.991,108.143 ccw(c162.946,107.188) SW2.12@161.595,107.188 ; U1.5@162.941,72.39 170.561,72.39 171.831,73.66 185.42,73.66 Pu1.5@186.436,72.644 ; U1.5@163.345,71.986 cw(c164.321,71.01) 164.321,72.39 cw(c164.321,73.77) U1.5@163.345,72.794 ; Pu1.5@185.877,72.644 ccw(c184.526,72.644) 185.481,73.599 ccw(c186.436,74.554) Pu1.5@186.436,73.203
P1.5: J5.5 J6.5 J10.5 Pu1.6 SW2.11 U1.6 | length 233.1
  Top Layer w0.381: J6.5@94.6,25.796 ccw(c93.645,26.751) 94.996,26.751 ccw(c96.347,26.751) J6.5@95.392,25.796 ; J5.5@94.6,31.1 cw(c93.645,30.145) 94.996,30.145 cw(c96.347,30.145) J5.5@95.392,31.1 ; J6.5@94.996,25.4 J5.5@94.996,31.496 ; J10.5@147.32,129.032 148.69,129.032 156.515,121.207 ; J10.5@147.716,128.636 cw(c148.671,127.681) 148.671,129.032 cw(c148.671,130.383) J10.5@147.716,129.428 ; v1(158.725,45.314) 159.36,45.949 159.36,69.264 159.946,69.85 ; SW2.11@161.036,104.648 162.281,105.893 162.281,110.617 161.925,110.973 159.739,110.973 158.952,111.76 158.952,118.769 156.515,121.207 ; SW2.11@161.036,105.207 ccw(c161.036,106.558) 161.991,105.603 ccw(c162.946,104.648) SW2.11@161.595,104.648 ; U1.6@162.537,69.446 ccw(c161.561,68.47) 161.561,69.85 ccw(c161.561,71.23) U1.6@162.537,70.254 ; U1.6@162.941,69.85 159.946,69.85 ; 156.515,121.207 156.515,113.411 157.62,112.306 157.62,92.189 158.629,91.18 158.629,70.479 159.258,69.85 159.946,69.85
  Bottom Layer w0.381: J5.5@94.67,31.951 ccw(c94.214,32.586) 94.996,32.586 ; J5.5@94.996,31.496 94.996,32.586 ; J5.5@95.322,31.951 cw(c95.778,32.586) 94.996,32.586 ; v1@158.41,44.999 ccw(c157.651,44.24) 157.651,45.314 ccw(c157.651,46.387) v1@158.41,45.628 ; v1(158.725,45.314) 152.324,45.314 146.634,39.624 125.374,39.624 123.558,37.808 100.218,37.808 94.996,32.586 ; U1.6@162.941,69.85 164.211,71.12 179.451,71.12 180.467,70.104 Pu1.6@186.436,70.104 ; U1.6@162.941,70.421 ccw(c162.941,71.801) 163.917,70.826 ccw(c164.892,69.85) U1.6@163.512,69.85 ; Pu1.6@186.04,69.708 ccw(c185.085,68.753) 185.085,70.104 ccw(c185.085,71.455) Pu1.6@186.04,70.5
P1.6: J5.6 J6.6 J10.3 Pu1.7 SW2.10 U1.7 | length 243.6
  Top Layer w0.381: J6.6@97.14,25.796 ccw(c96.185,26.751) 97.536,26.751 ccw(c98.887,26.751) J6.6@97.932,25.796 ; J5.6@97.14,31.1 cw(c96.185,30.145) 97.536,30.145 cw(c98.887,30.145) J5.6@97.932,31.1 ; J6.6@97.536,25.4 J5.6@97.536,31.496 ; J10.3@147.32,125.933 cw(c147.32,124.582) 148.275,125.537 cw(c149.23,126.492) J10.3@147.879,126.492 ; J10.3@147.32,126.492 152.171,121.641 152.171,108.902 152.615,108.458 154.305,108.458 156.248,106.515 156.248,102.603 v1(155.118,101.473) ; v1@155.118,101.917 ccw(c155.118,102.991) 155.877,102.232 ccw(c156.635,101.473) v1@155.562,101.473 ; v1@160.569,42.199 ccw(c159.81,42.958) 160.884,42.958 ccw(c161.957,42.958) v1@161.198,42.199 ; v1(160.884,41.885) 160.884,66.497 161.696,67.31 ; U1.7@162.508,66.938 ccw(c161.696,66.241) 161.696,67.31 ; U1.7@162.508,67.682 cw(c161.696,68.379) 161.696,67.31 ; U1.7@163.345,66.906 cw(c164.321,65.93) 164.321,67.31 cw(c164.321,68.69) U1.7@163.345,67.714 ; v1@169.612,100.524 cw(c168.853,99.765) 169.926,99.765 cw(c170.999,99.765) v1@170.24,100.524 ; v1(169.926,100.838) 169.926,90.219 169.477,89.77 169.477,71.509 165.278,67.31 U1.7@162.941,67.31 161.696,67.31
  Bottom Layer w0.381: J5.6@97.536,31.496 102.476,36.436 122.161,36.436 122.466,36.131 147.738,36.131 153.491,41.885 v1(160.884,41.885) ; J5.6@97.536,32.055 ccw(c97.536,33.406) 98.491,32.451 ccw(c99.446,31.496) J5.6@98.095,31.496 ; v1(155.118,101.473) 156.159,101.473 ; v1@155.439,101.166 cw(c156.159,100.475) 156.159,101.473 ; v1@155.439,101.78 ccw(c156.159,102.471) 156.159,101.473 ; v1@160.569,41.57 ccw(c159.81,40.811) 159.81,41.885 ccw(c159.81,42.958) v1@160.569,42.199 ; SW2.10@161.036,101.549 cw(c161.036,100.198) 161.991,101.153 cw(c162.946,102.108) SW2.10@161.595,102.108 ; SW2.10@161.036,102.108 162.306,100.838 ; U1.7@162.758,67.361 cw(c163.46,67.165) 163.46,67.894 ; U1.7@162.941,67.31 163.525,67.894 164.464,67.894 ; U1.7@163.124,67.259 cw(c163.962,67.025) 163.962,67.894 ; U1.7@163.491,67.156 cw(c164.464,66.885) 164.464,67.894 ; v1@169.612,100.524 ccw(c168.853,99.765) 168.853,100.838 ccw(c168.853,101.911) v1@169.612,101.152 ; v1(169.926,100.838) 162.306,100.838 ; Pu1.7@186.04,67.168 ccw(c185.085,66.213) 185.085,67.564 ccw(c185.085,68.915) Pu1.7@186.04,67.96 ; Pu1.7@186.436,67.564 183.312,67.564 182.296,68.58 165.15,68.58 164.464,67.894 ; 156.159,101.473 159.334,98.298 161.544,98.298 162.306,99.06 162.306,100.838
P1.7: J5.15 J10.1 Pu1.8 SW2.9 U1.8 | length 209.3
  Top Layer w0.381: J5.15@120.396,31.496 124.308,35.408 131.597,35.408 133.667,37.478 133.667,39.497 132.893,40.272 v1(132.893,65.024) ; J5.15@120.396,32.055 ccw(c120.396,33.406) 121.351,32.451 ccw(c122.306,31.496) J5.15@120.955,31.496 ; v1@132.578,64.71 cw(c131.82,63.951) 132.893,63.951 cw(c133.966,63.951) v1@133.207,64.71 ; J10.1@147.32,123.393 cw(c147.32,122.042) 148.275,122.997 cw(c149.23,123.952) J10.1@147.879,123.952 ; J10.1@147.32,123.952 151.485,119.787 151.485,104.801 152.908,103.378 v1(155.118,103.378) ; v1@154.803,103.064 ccw(c154.045,102.305) 154.045,103.378 ccw(c154.045,104.451) v1@154.803,103.692 ; U1.8@162.941,64.77 166.655,64.77 171.742,69.857 171.742,89.77 171.069,90.443 171.069,102.667 ; U1.8@163.345,64.366 cw(c164.321,63.39) 164.321,64.77 cw(c164.321,66.15) U1.8@163.345,65.174 ; v1(170.358,103.378) 171.069,102.667 ; v1@170.379,102.934 cw(c170.422,102.019) 171.069,102.667 ; v1@170.802,103.357 ccw(c171.716,103.314) 171.069,102.667
  Bottom Layer w0.381: v1(132.893,65.024) 143.713,65.024 143.967,64.77 U1.8@162.941,64.77 163.943,64.77 165.213,66.04 183.718,66.04 184.734,65.024 Pu1.8@186.436,65.024 ; v1@133.207,64.71 cw(c133.966,63.951) 133.966,65.024 cw(c133.966,66.097) v1@133.207,65.338 ; v1(155.118,103.378) 157.226,103.378 159.766,100.838 ; v1@155.432,103.064 cw(c156.191,102.305) 156.191,103.378 cw(c156.191,104.451) v1@155.432,103.692 ; SW2.9@160.477,99.568 ccw(c159.126,99.568) 160.081,100.523 ccw(c161.036,101.478) SW2.9@161.036,100.127 ; SW2.9@161.036,99.568 159.766,100.838 ; U1.8@162.537,64.366 ccw(c161.561,63.39) 161.561,64.77 ccw(c161.561,66.15) U1.8@162.537,65.174 ; v1@170.043,103.064 ccw(c169.285,102.305) 169.285,103.378 ccw(c169.285,104.451) v1@170.043,103.692 ; v1(170.358,103.378) 160.274,103.378 159.766,102.87 159.766,100.838
P2.0: P10.3 Pu2.20 SW1.1 U1.21 U4.25 | length 277
  Top Layer w0.381: SW1.1@176.276,99.568 177.521,100.813 177.521,110.666 177.165,111.023 175.451,111.023 174.345,112.128 174.345,118.249 182.816,126.721 v1(183.312,126.721) ; SW1.1@176.276,100.127 ccw(c176.276,101.478) 177.231,100.523 ccw(c178.186,99.568) SW1.1@176.835,99.568 ; 177.521,108.458 175.26,108.458 173.838,107.036 173.838,63.081 173.291,62.535 173.291,39.179 U1.21@178.181,34.29 ; U1.21@177.609,34.29 ccw(c176.23,34.29) 177.205,35.266 ccw(c178.181,36.241) U1.21@178.181,34.861 ; 181.707,125.612 cw(c183.312,124.007) v1@183.312,126.276 ; 182.358,126.262 cw(c183.312,125.308) v1@183.312,126.657
  Bottom Layer w0.381: P10.3@111.201,148.844 ccw(c109.85,148.844) 110.805,149.799 ccw(c111.76,150.754) P10.3@111.76,149.403 ; P10.3@111.76,148.844 110.236,150.368 108.585,150.368 107.569,149.352 107.569,147.599 115.926,139.243 172.085,139.243 187.35,123.977 ; U1.21@178.181,33.718 cw(c178.181,32.339) 179.157,33.314 cw(c180.132,34.29) U1.21@178.752,34.29 ; U1.21@178.181,34.29 180.747,31.724 186.156,31.724 Pu2.20@188.976,34.544 ; v1@183.312,126.276 cw(c183.312,125.203) 184.071,125.962 cw(c184.829,126.721) v1@183.756,126.721 ; v1(183.312,126.721) 186.055,123.977 192.43,123.977 193.421,124.968 209.55,124.968 U4.25@215.9,118.618 ; Pu2.20@188.417,34.544 cw(c187.066,34.544) 188.021,33.589 cw(c188.976,32.634) Pu2.20@188.976,33.985 ; U4.25@215.328,118.618 ccw(c213.949,118.618) 214.924,119.594 ccw(c215.9,120.569) U4.25@215.9,119.189
P2.1: P10.2 Pu2.19 SW1.2 U1.22 U4.24 | length 268.3
  Top Layer w0.381: P10.2@114.3,148.844 118.288,152.832 156.21,152.832 156.972,152.07 156.972,150.571 167.132,140.411 167.132,135.89 168.402,134.62 168.402,129.007 170.942,126.467 v1(170.942,105.791) ; P10.2@114.3,149.403 ccw(c114.3,150.754) 115.255,149.799 ccw(c116.21,148.844) P10.2@114.859,148.844 ; v1@170.628,106.105 ccw(c169.869,106.864) 170.942,106.864 ccw(c172.015,106.864) v1@171.256,106.105 ; v1@172.38,98.847 cw(c171.836,98.303) 172.606,98.303 ; 172.606,97.874 cw(c173.982,97.874) v1@173.009,98.847 ; v1(172.695,99.162) 172.606,99.073 172.606,38.087 177.673,33.02 178.816,33.02 179.451,33.655 179.451,35.56 U1.22@178.181,36.83 ; U1.22@178.181,36.258 cw(c178.181,34.879) 179.157,35.854 cw(c180.132,36.83) U1.22@178.752,36.83
  Bottom Layer w0.381: v1@170.942,105.346 cw(c170.942,104.273) 171.701,105.032 cw(c172.46,105.791) v1@171.386,105.791 ; v1(170.942,105.791) 174.625,102.108 SW1.2@176.276,102.108 ; v1(172.695,99.162) 173.33,99.797 SW1.2@176.276,102.108 ; SW1.2@175.717,102.108 ccw(c174.366,102.108) 175.321,103.063 ccw(c176.276,104.018) SW1.2@176.276,102.667 ; SW1.2@175.721,102.175 cw(c174.38,102.337) 175.213,101.274 cw(c176.047,100.212) SW1.2@176.209,101.553 ; SW1.2@175.88,101.712 ccw(c174.925,100.757) 174.925,102.108 ccw(c174.925,103.459) SW1.2@175.88,102.504 ; U1.22@178.181,36.83 181.864,36.83 182.88,35.814 187.706,35.814 Pu2.19@188.976,37.084 ; U1.22@178.585,36.426 cw(c179.561,35.45) 179.561,36.83 cw(c179.561,38.21) U1.22@178.585,37.234 ; Pu2.19@188.417,37.084 cw(c187.066,37.084) 188.021,36.129 cw(c188.976,35.174) Pu2.19@188.976,36.525 ; U4.24@215.496,115.674 ccw(c214.52,114.698) 214.52,116.078 ccw(c214.52,117.458) U4.24@215.496,116.482 ; U4.24@215.9,116.078 205.435,116.078 204.165,114.808 199.009,114.808 197.409,113.208 179.4,113.208 177.19,110.998 175.514,110.998 175.006,110.49 175.006,103.378 SW1.2@176.276,102.108
P2.2: Pu2.18 SW1.3 U1.23 U4.21 | length 156.1
  Top Layer w0.381: 189.446,99.167 cw(c191.993,99.167) v1@190.192,100.968 ; 189.446,100.087 cw(c191.073,100.087) v1@189.923,101.238 ; v1(189.878,101.282) 189.446,100.851 189.446,92.367 192.71,89.103 192.71,69.698 194.45,67.958 194.45,43.828 195.58,42.697 v1(195.58,41.478) ; v1@195.266,41.793 ccw(c194.507,42.551) 195.58,42.551 ccw(c196.653,42.551) v1@195.894,41.793 ; v1@197.704,103.515 ccw(c196.945,104.273) 198.018,104.273 ccw(c199.092,104.273) v1@198.333,103.515 ; v1(198.018,103.2) 198.018,107.15 198.044,107.175 201.422,107.175 v1(204.432,104.165) ; v1@203.987,104.165 ccw(c202.914,104.165) 203.673,104.924 ccw(c204.432,105.683) v1@204.432,104.61
  Bottom Layer w0.381: SW1.3@176.276,104.089 cw(c176.276,102.738) 177.231,103.693 cw(c178.186,104.648) SW1.3@176.835,104.648 ; SW1.3@176.276,104.648 177.724,103.2 187.96,103.2 ; U1.23@178.181,39.37 179.172,39.37 179.68,38.862 185.268,38.862 185.776,38.354 187.706,38.354 Pu2.18@188.976,39.624 190.106,38.494 192.595,38.494 v1(195.58,41.478) ; Pu2.18@188.417,39.624 cw(c187.066,39.624) 188.021,38.669 cw(c188.976,37.714) 188.976,39.065 cw(c188.976,37.714) 189.931,38.669 cw(c190.886,39.624) Pu2.18@189.535,39.624 ; v1@189.433,101.282 ccw(c188.36,101.282) 189.119,102.041 ccw(c189.878,102.8) v1@189.878,101.727 ; v1(189.878,101.282) 187.96,103.2 ; v1@195.135,41.478 cw(c194.062,41.478) 194.821,40.719 cw(c195.58,39.961) v1@195.58,41.034 ; v1@197.704,102.886 ccw(c196.945,102.127) 196.945,103.2 ccw(c196.945,104.273) v1@197.704,103.515 ; v1(198.018,103.2) 187.96,103.2 ; v1(204.432,104.165) 211.607,104.165 U4.21@215.9,108.458 ; v1@204.746,103.851 cw(c205.505,103.092) 205.505,104.165 cw(c205.505,105.239) v1@204.746,104.48 ; U4.21@215.328,108.458 cw(c213.949,108.458) 214.924,107.482 cw(c215.9,106.507) U4.21@215.9,107.886
P2.3: Pu2.17 SW1.4 U1.24 U4.23 | length 138.5
  Top Layer w0.381: SW1.4@175.717,107.188 cw(c174.366,107.188) 175.321,106.233 cw(c176.276,105.278) SW1.4@176.276,106.629 ; SW1.4@176.276,107.188 174.523,105.435 174.523,62.598 173.977,62.052 173.977,56.137 174.523,55.59 174.523,45.568 U1.24@178.181,41.91 ; U1.24@177.609,41.91 ccw(c176.23,41.91) 177.205,42.886 ccw(c178.181,43.861) U1.24@178.181,42.481
  Bottom Layer w0.381: SW1.4@176.276,107.188 179.797,110.709 197.485,110.709 198.171,110.023 198.171,108.737 199.72,107.188 201.105,107.188 201.27,107.353 204.229,107.353 210.414,113.538 U4.23@215.9,113.538 ; SW1.4@176.276,107.747 ccw(c176.276,109.098) 177.231,108.143 ccw(c178.186,107.188) SW1.4@176.835,107.188 ; U1.24@178.181,41.91 183.947,41.91 184.963,40.894 187.706,40.894 Pu2.17@188.976,42.164 ; U1.24@178.585,41.506 cw(c179.561,40.53) 179.561,41.91 cw(c179.561,43.29) U1.24@178.585,42.314 ; Pu2.17@188.417,42.164 cw(c187.066,42.164) 188.021,41.209 cw(c188.976,40.254) Pu2.17@188.976,41.605 ; U4.23@215.496,113.134 ccw(c214.52,112.158) 214.52,113.538 ccw(c214.52,114.918) U4.23@215.496,113.942
P2.4: Pu2.16 SW1.5 U1.25 U4.2 U14.12 U15.12 | length 289.2
  Top Layer w0.381: SW1.5@175.879,109.333 ccw(c174.93,108.389) 174.93,109.728 ; SW1.5@175.879,110.123 cw(c174.93,111.067) 174.93,109.728 ; SW1.5@176.276,109.728 174.93,109.728 ; v1@178.376,127.005 cw(c177.303,127.005) 178.062,126.246 cw(c178.821,125.487) v1@178.821,126.56 ; v1(178.821,127.005) 172.58,120.764 172.58,119.037 173.659,117.958 173.659,110.999 174.93,109.728 ; v1(182.321,44.45) 183.845,45.974 187.706,45.974 Pu2.16@188.976,44.704 ; v1@182.321,44.895 ccw(c182.321,45.968) 183.08,45.209 ccw(c183.839,44.45) v1@182.766,44.45 ; Pu2.16@188.417,44.704 ccw(c187.066,44.704) 188.021,45.659 ccw(c188.976,46.614) Pu2.16@188.976,45.263 ; U4.2@200.66,123.698 202.387,125.425 202.387,132.715 205.105,135.433 205.105,136.931 206.882,138.709 213.335,138.709 214.581,139.954 U14.12@219.71,139.954 ; U4.2@200.66,124.269 ccw(c200.66,125.649) 201.636,124.674 ccw(c202.611,123.698) U4.2@201.231,123.698 ; U14.12@219.314,139.558 ccw(c218.359,138.603) 218.359,139.954 ccw(c218.359,141.305) U14.12@219.314,140.35 ; U15.12@230.886,139.395 cw(c230.886,138.044) 231.841,138.999 cw(c232.796,139.954) U15.12@231.445,139.954 ; U15.12@230.886,139.954 232.74,138.1 232.74,120.65 233.502,119.888 236.982,119.888 237.744,120.65 240.894,120.65 242.317,119.227 242.317,93.945 240.83,92.458 240.83,91.302 242.393,89.74 242.393,79.969 241.744,79.32 241.744,52.21 v1(237.363,47.828) ; v1@237.363,48.273 ccw(c237.363,49.346) 238.122,48.587 ccw(c238.881,47.828) v1@237.807,47.828
  Bottom Layer w0.381: U1.25@178.181,44.45 v1(182.321,44.45) ; U1.25@178.585,44.046 cw(c179.561,43.07) 179.561,44.45 cw(c179.561,45.83) U1.25@178.585,44.854 ; v1@178.821,126.56 cw(c178.821,125.487) 179.579,126.246 cw(c180.338,127.005) v1@179.265,127.005 ; v1(178.821,127.005) 183.287,122.538 190.995,122.538 192.825,120.709 197.671,120.709 U4.2@200.66,123.698 ; v1@182.007,44.136 ccw(c181.248,43.377) 181.248,44.45 ccw(c181.248,45.523) v1@182.007,44.764 ; Pu2.16@188.976,44.704 192.1,47.828 v1(237.363,47.828) ; Pu2.16@188.976,45.263 ccw(c188.976,46.614) 189.931,45.659 ccw(c190.886,44.704) Pu2.16@189.535,44.704 ; U4.2@200.088,123.698 cw(c198.709,123.698) 199.684,122.722 cw(c200.66,121.747) U4.2@200.66,123.126 ; U14.12@219.71,139.954 220.853,139.954 ; U14.12@220.152,139.611 cw(c220.853,139.066) 220.853,139.954 ; U14.12@220.152,140.297 ccw(c220.853,140.842) 220.853,139.954 ; U15.12@230.327,139.954 ccw(c228.976,139.954) 229.931,140.909 ccw(c230.886,141.864) U15.12@230.886,140.513 ; U15.12@230.886,139.954 229.616,141.224 222.123,141.224 220.853,139.954 ; v1@237.049,47.514 ccw(c236.29,46.755) 236.29,47.828 ccw(c236.29,48.901) v1@237.049,48.143
P2.5: J15.5 Pu2.15 SW1.6 U1.26 U4.26 | length 152.2
  Top Layer w0.381: SW1.6@176.276,112.268 177.598,112.268 ; SW1.6@176.678,111.878 cw(c177.598,110.986) 177.598,112.268 ; SW1.6@176.678,112.658 ccw(c177.598,113.55) 177.598,112.268 ; U1.26@177.609,46.99 ccw(c176.23,46.99) 177.205,47.966 ccw(c178.181,48.941) U1.26@178.181,47.561 ; U1.26@178.181,46.99 175.539,49.632 175.539,55.946 174.663,56.822 174.663,61.366 175.539,62.243 175.539,96.341 177.521,98.323 177.521,99.44 178.207,100.126 178.207,111.659 177.598,112.268 ; v1@185.868,118.533 ccw(c184.496,119.905) 186.436,119.905 ; v1@186.137,118.264 ccw(c185.415,118.985) 186.436,118.985 ; v1(186.182,118.219) 186.436,118.473 186.436,123.305 189.382,126.251 191.402,126.251 J15.5@192.659,127.508 ; J15.5@192.1,127.508 cw(c190.749,127.508) 191.704,126.553 cw(c192.659,125.598) J15.5@192.659,126.949
  Bottom Layer w0.381: SW1.6@176.276,112.268 179.712,115.704 183.667,115.704 v1(186.182,118.219) ; SW1.6@176.276,112.827 ccw(c176.276,114.178) 177.231,113.223 ccw(c178.186,112.268) SW1.6@176.835,112.268 ; U1.26@178.181,46.99 183.921,46.99 184.937,45.974 187.706,45.974 Pu2.15@188.976,47.244 ; U1.26@178.585,46.586 cw(c179.561,45.61) 179.561,46.99 cw(c179.561,48.37) U1.26@178.585,47.394 ; v1@185.737,118.219 cw(c184.664,118.219) 185.423,117.46 cw(c186.182,116.701) v1@186.182,117.774 ; Pu2.15@188.417,47.244 cw(c187.066,47.244) 188.021,46.289 cw(c188.976,45.334) Pu2.15@188.976,46.685 ; J15.5@192.659,127.508 193.535,126.632 198.547,126.632 199.423,127.508 208.305,127.508 214.655,121.158 ; U4.26@215.467,120.786 ccw(c214.655,120.089) 214.655,121.158 ; U4.26@215.467,121.53 cw(c214.655,122.227) 214.655,121.158 ; U4.26@215.9,121.158 214.655,121.158
P2.6: J11.1 J15.6 Pu2.14 SW1.7 U1.27 U4.1 | length 282.7
  Top Layer w0.381: v1@167.554,50.486 cw(c166.795,49.727) 167.869,49.727 cw(c168.942,49.727) v1@168.183,50.486 ; v1(167.869,50.8) 167.869,41.24 176.774,32.334 179.1,32.334 180.137,33.371 180.137,47.574 179.197,48.514 ; SW1.7@175.717,114.808 ccw(c174.366,114.808) 175.321,115.763 ccw(c176.276,116.718) SW1.7@176.276,115.367 ; SW1.7@176.276,114.249 cw(c176.276,112.898) 177.231,113.853 cw(c178.186,114.808) SW1.7@176.835,114.808 ; U1.27@177.609,49.53 ccw(c176.23,49.53) 177.205,50.506 ccw(c178.181,51.481) U1.27@178.181,50.102 ; Pu2.14@188.417,49.784 cw(c187.066,49.784) 188.021,48.829 cw(c188.976,47.874) Pu2.14@188.976,49.225 ; Pu2.14@188.976,49.784 187.706,48.514 179.197,48.514 ; v1(191.444,125.12) 192.761,125.12 193.929,126.289 193.929,128.778 J15.6@192.659,130.048 189.179,133.528 186.03,133.528 184.582,132.08 184.582,125.421 182.622,123.46 180.559,123.46 175.031,117.931 175.031,116.053 SW1.7@176.276,114.808 178.893,112.191 178.893,99.377 178.27,98.754 178.27,97.7 176.225,95.655 176.225,61.557 175.349,60.681 175.349,57.508 176.225,56.632 176.225,51.486 U1.27@178.181,49.53 179.197,48.514 ; v1@191.758,124.806 cw(c192.517,124.047) 192.517,125.12 cw(c192.517,126.194) v1@191.758,125.435 ; J15.6@192.1,130.048 ccw(c190.749,130.048) 191.704,131.003 ccw(c192.659,131.958) J15.6@192.659,130.607 ; J15.6@192.659,129.489 cw(c192.659,128.138) 193.614,129.093 cw(c194.569,130.048) J15.6@193.218,130.048
  Bottom Layer w0.381: J11.1@85.208,42.438 86.024,42.438 86.589,43.002 ; J11.1@85.344,42.621 ccw(c85.771,43.196) 86.276,42.69 ; J11.1@85.571,42.927 ccw(c86.037,43.554) 86.589,43.002 ; v1@167.554,50.486 ccw(c166.795,49.727) 166.795,50.8 ccw(c166.795,51.873) v1@167.554,51.114 ; v1(167.869,50.8) 153.162,50.8 150.343,47.981 147.32,47.981 144.043,44.704 125.349,44.704 124.587,45.466 118.593,45.466 116.129,43.002 86.589,43.002 ; v1(191.444,125.12) 192.13,125.806 ; v1@191.477,125.564 ccw(c191.539,126.397) 192.13,125.806 ; v1@191.887,125.153 cw(c192.721,125.215) 192.13,125.806 ; 199.387,125.803 cw(c200.188,125.002) U4.1@200.592,126.06 ; 199.802,126.218 cw(c200.417,125.603) U4.1@200.728,126.416 ; U4.1@200.66,126.238 199.822,126.238 199.39,125.806 192.13,125.806